# Altium PCB main.PcbDoc (part 1 of 2)
Units mm, origin at the board's own origin, x right, y up, seen from the top; angles counter-clockwise.
Board outline 83 x 38 mm, 4 copper layers (Top Layer, Inner 1, Inner 2, Bottom Layer), stack 1.586 mm thick; 91 components, 60 nets, 272 pads, 642 vias.
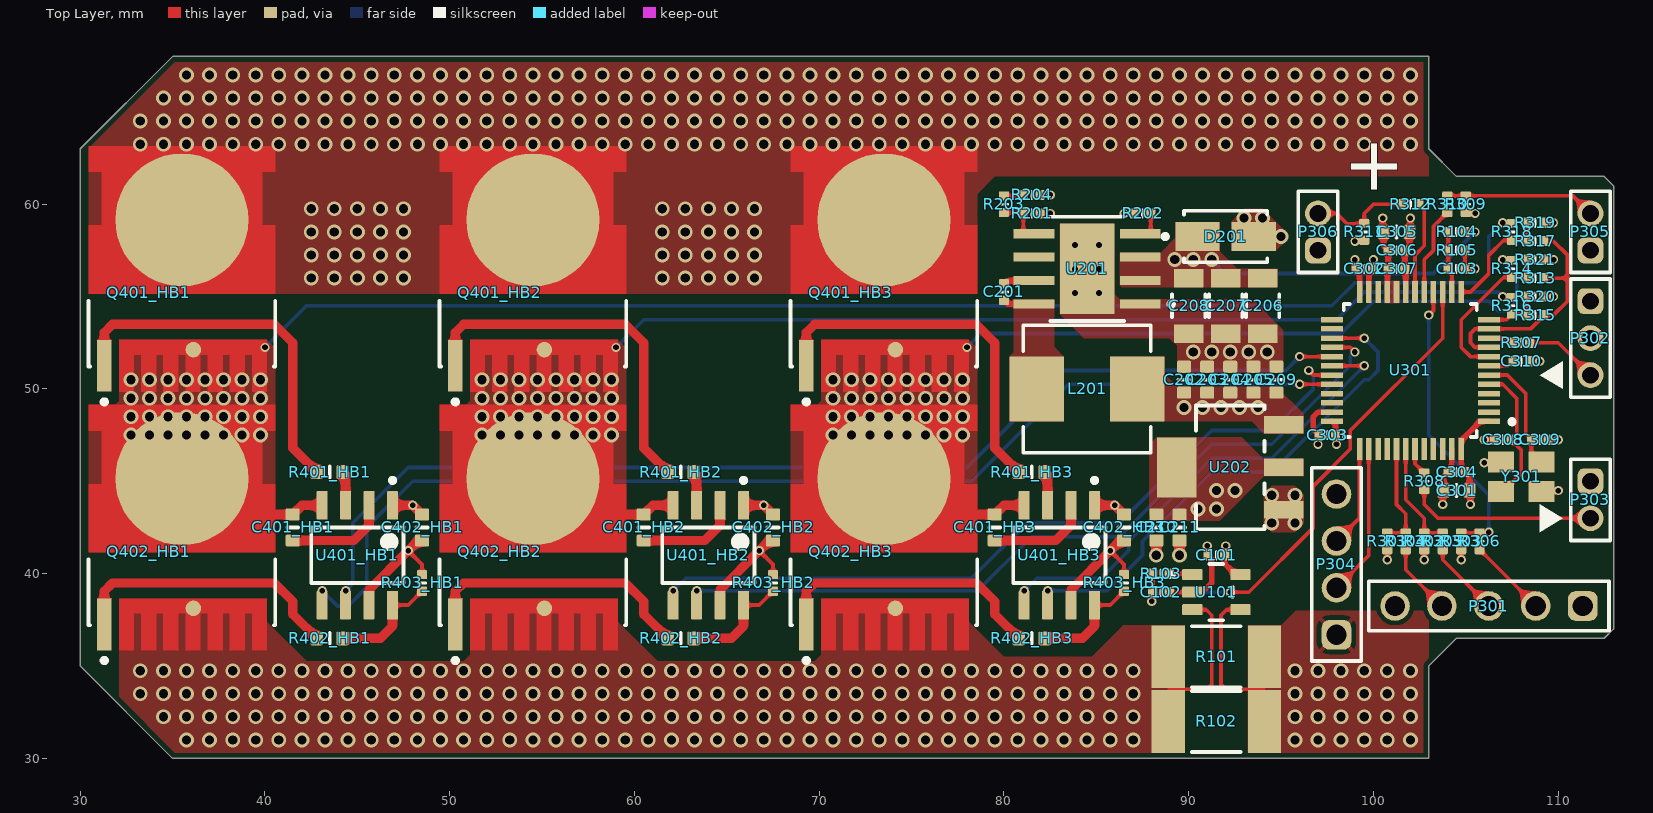
[diagram p0: Top Layer view]
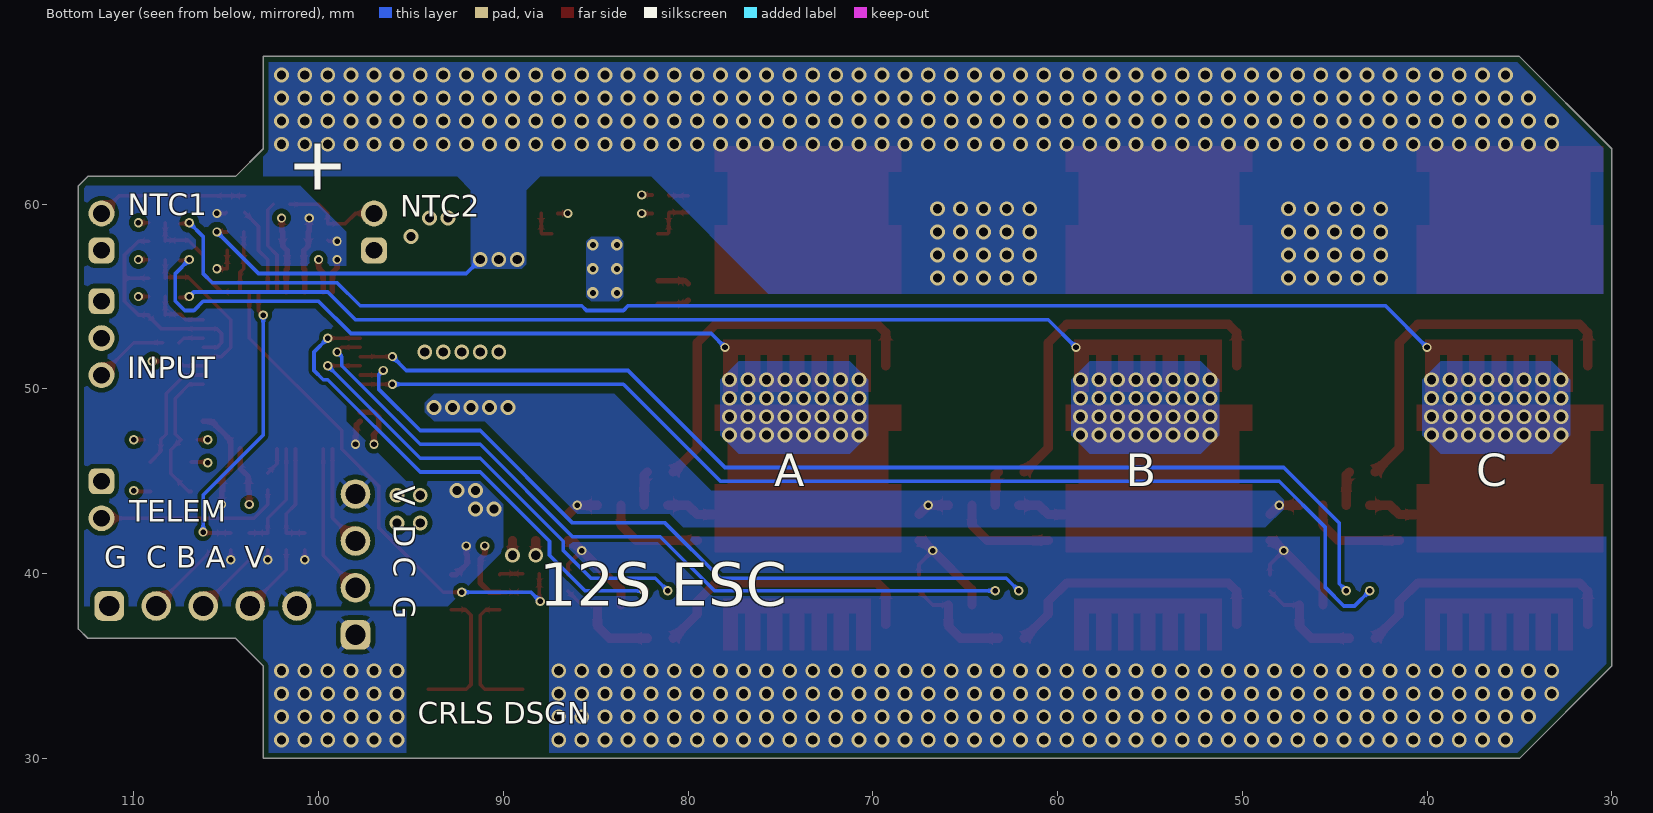
[diagram p1: Bottom Layer view, seen from below]
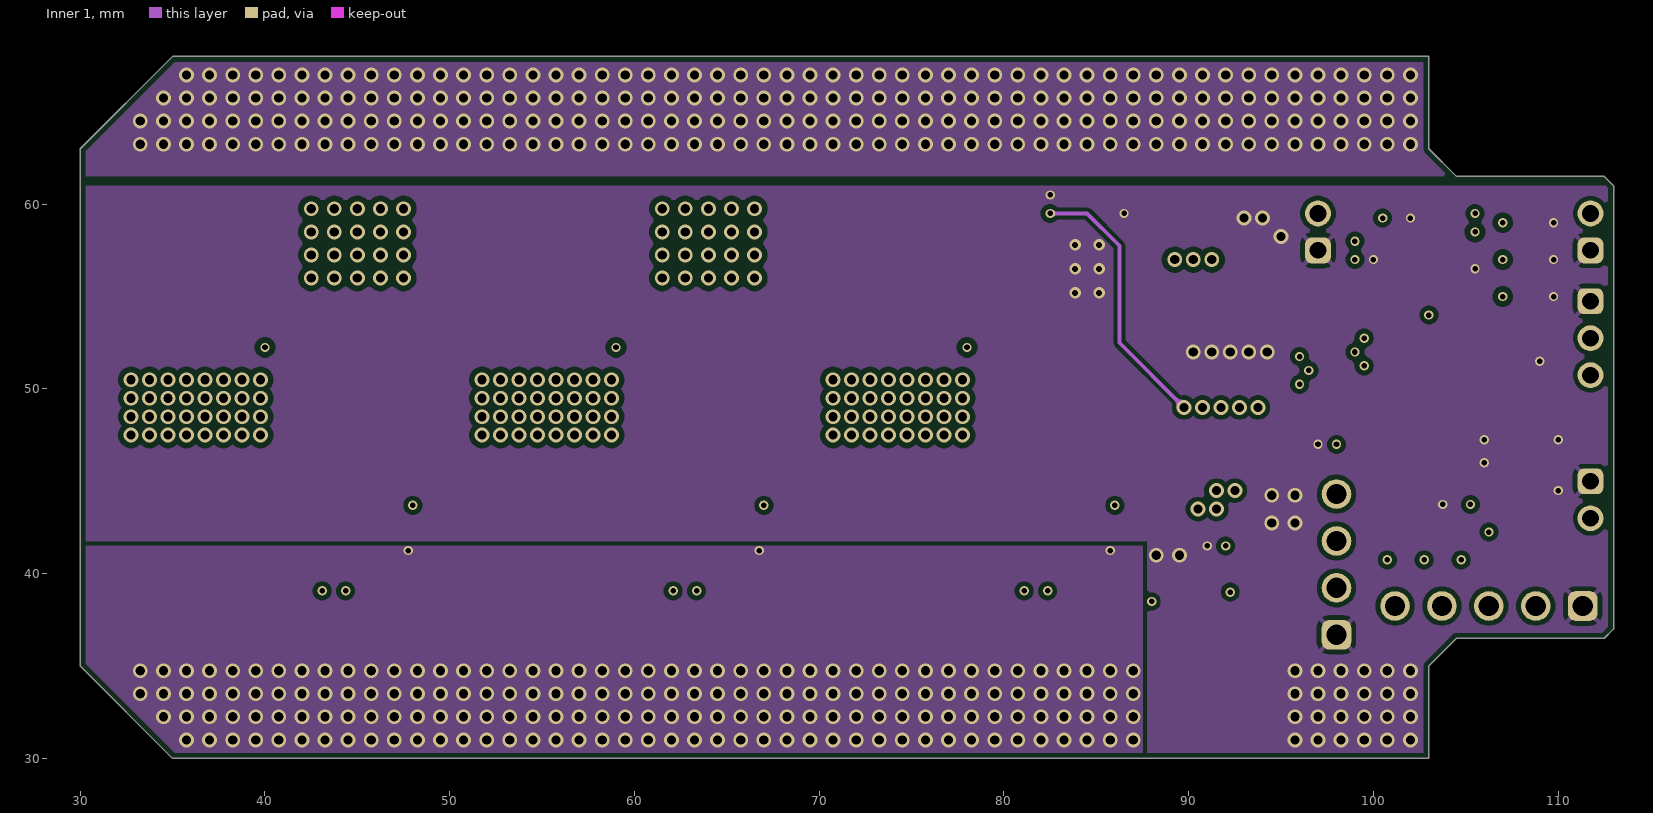
[diagram p2: Inner 1]
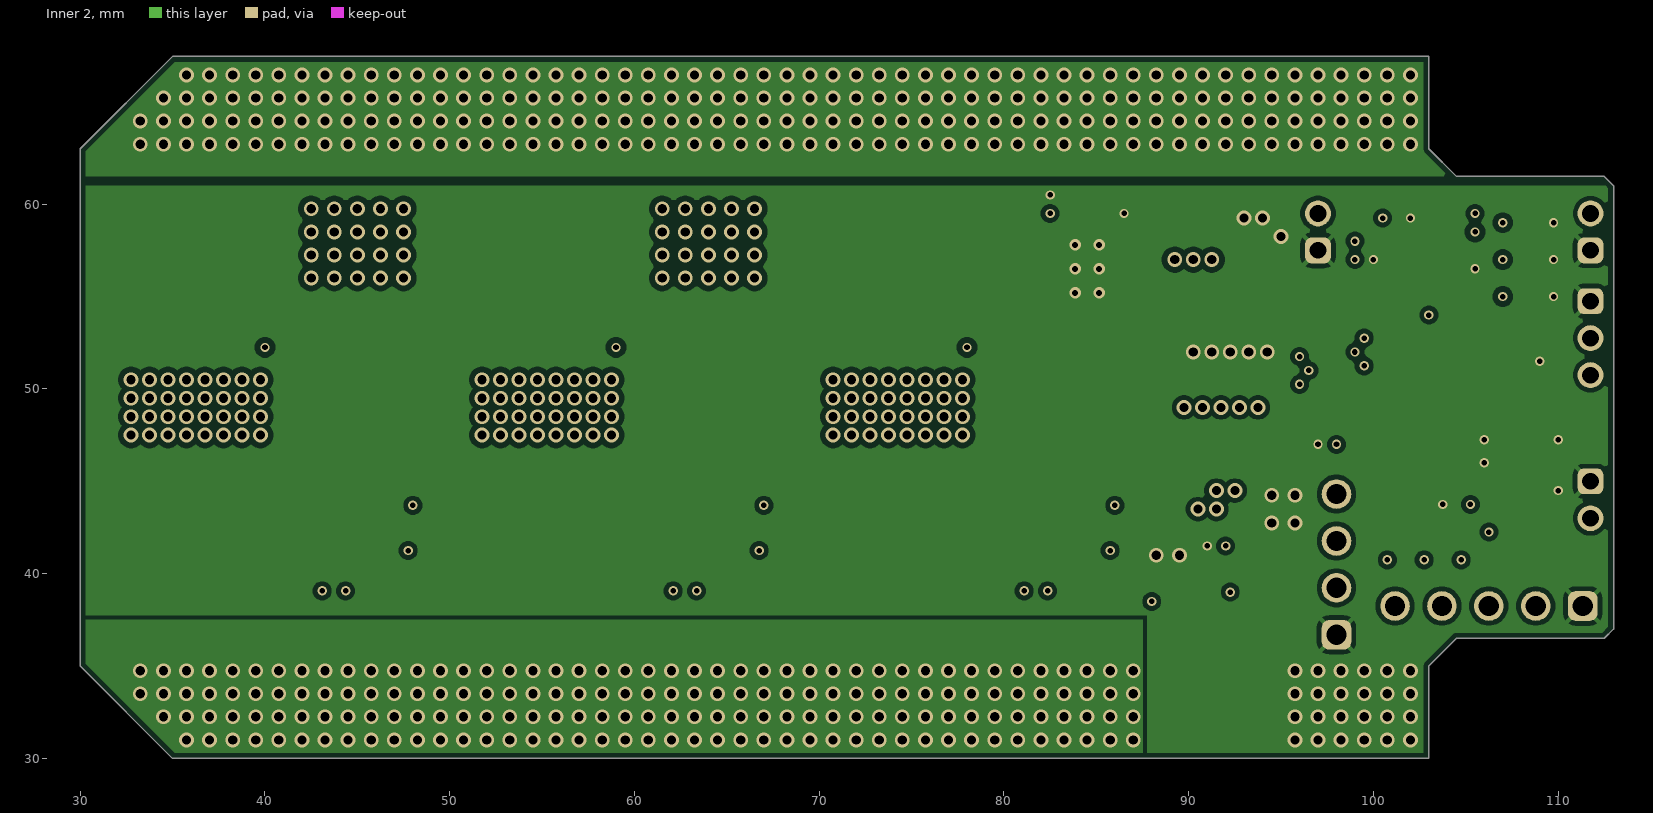
[diagram p3: Inner 2]
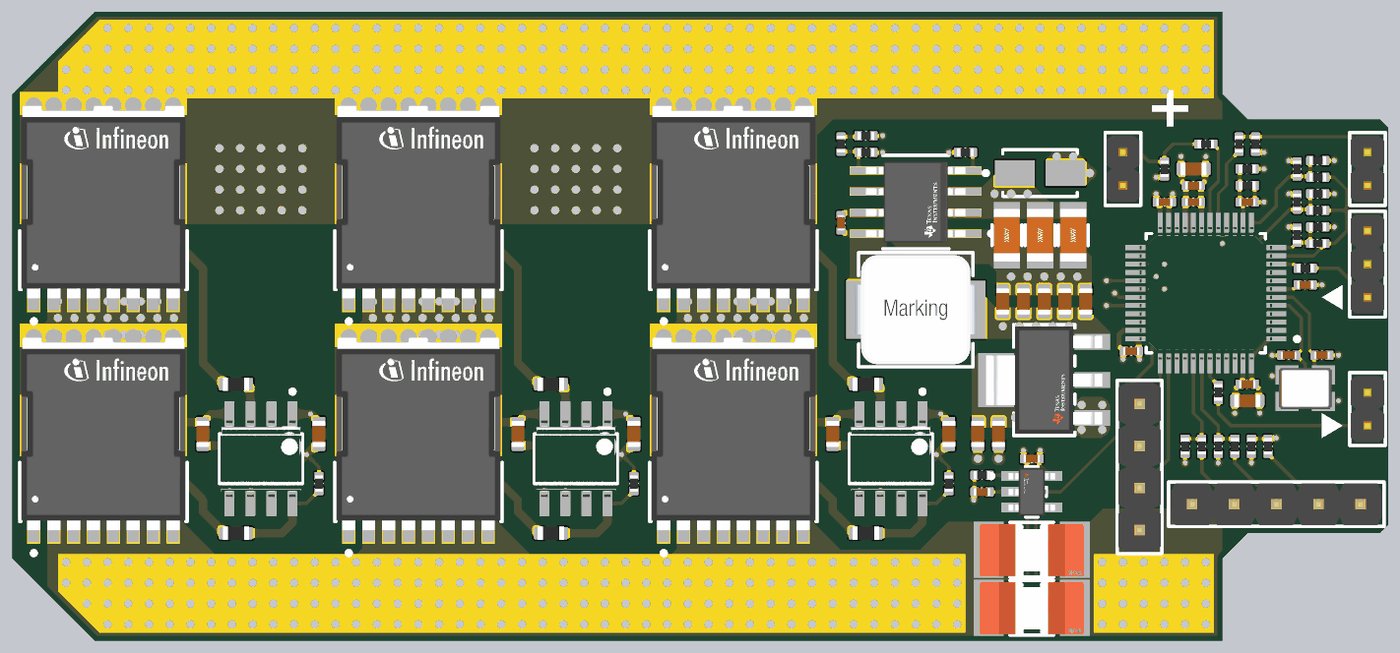
[diagram p5: 3D render of the assembled board from above, using the file's embedded part models]

## Layer stack, top to bottom
Top Solder: solder mask 0.0102, Solder Resist, Dk 3.5
Top Layer: signal copper 0.035
Dielectric 2: prepreg 0.2104, PP-006, Dk 4.4
Inner 1: signal copper 0.0152
Dielectric 1: dielectric 1.065, FR-4, Dk 4.6
Inner 2: signal copper 0.0152
Dielectric 3: prepreg 0.2104, PP-006, Dk 4.4
Bottom Layer: signal copper 0.035
Bottom Solder: solder mask 0.0102, Solder Resist, Dk 3.5

## Board outline
30,35 30,63 35,68 103,68 103,63 104.5,61.5 112.5,61.5 113,61 113,37 112.5,36.5 104.5,36.5 103,35 103,30 35,30

## Design rules (kind name [scope] priority, off if disabled: settings)
BoardOutlineClearance [All] p1: gap=0.3 ignorepadtopadclearanceinfootprint=FALSE
Clearance HVClearance [InNet('+BATT','PHASE_*')] p1: gap=0.3 ignorepadtopadclearanceinfootprint=TRUE except(0.25: Arc-Arc Arc-Track Arc-SMDPad Arc-THPad Arc-Via Arc-Text Arc-Hole Track-Track Track-SMDPad Track-THPad Track-Via Track-Text Track-Hole SMDPad-SMDPad SMDPad-THPad SMDPad-Via SMDPad-Text SMDPad-Hole THPad-THPad THPad-Via THPad-Text THPad-Hole Via-Via Via-Text Via-Hole Text-Text Text-Hole)
Clearance [All] p2: gap=0.25 ignorepadtopadclearanceinfootprint=TRUE except(0.2: Arc-Arc Arc-Track Arc-SMDPad Arc-Fill Arc-Poly Arc-Region Track-Track Track-SMDPad Track-Fill Track-Poly Track-Region SMDPad-SMDPad SMDPad-Fill SMDPad-Poly SMDPad-Region Fill-Fill Fill-Poly Fill-Region Poly-Poly Poly-Region Region-Region)
HoleSize [All] p1: absolutevalues=TRUE maxlimit=5 minlimit=0.025 maxpercent=80.000 minpercent=20.000
MinimumSolderMaskSliver [All] p1: minsoldermaskwidth=0
PolygonConnect HeadersPolygonConnect [InComponent('P*')] p1: connectstyle=Relief reliefconductorwidth=0.25 reliefentries=4 polygonreliefangle="45 Angle" airgapwidth=0.25
PolygonConnect [All] p2: connectstyle=Direct reliefconductorwidth=0.2 reliefentries=4 polygonreliefangle="90 Angle" airgapwidth=0.2
RoutingVias [All] p1: holewidth=0.3 width=0.5 viastyle="Through Hole" minholewidth=0.3 minwidth=0.5 maxholewidth=1 maxwidth=2
SilkToSilkClearance [All] p1: silktosilkclearance=0
SilkToSolderMaskClearance [IsPad] p1: minsilkscreentomaskgap=0 clearancetoexposedcopper=TRUE
SolderMaskExpansion [All] p1: expansion=0.102 istentingtop=FALSE
SupplyNets "Schematic Supply Nets_3" [InNet('+BATT')] p1: voltage=0.000
SupplyNets "Schematic Supply Nets_2" [InNet('+BUCK')] p2: voltage=0.000
SupplyNets "Schematic Supply Nets_1" [InNet('GND')] p3: voltage=0.000
SupplyNets "Schematic Supply Nets" [InNet('+MCU')] p4: voltage=0.000
Width [All] p1: maxlimit=1 minlimit=0.2 preferedwidth=0.2 minimp=50.000000 maximp=50.000000 favimp=50.000000
26 further rules are at their usual default settings.

## Classes and differential pairs
channel class "4 half bridge": HB1 HB2 HB3
component class PS: C201 C202 C203 C204 C205 C206 C207 C208 C209 C210 C211 D201 L201 R201 R202 R203 R204 U201 U202
component class MCU: C301 C302 C303 C304 C305 C306 C307 C308 C309 C310 P301 P302 P303 P304 P305 P306 R301 R302 R303 R304 R305 R306 R307 R308 R309 R310 R311 R312 R313 R314 R315 R316 R317 R318 R319 R320 R321 U301 Y301
component class HB3: C401_HB3 C402_HB3 Q401_HB3 Q402_HB3 R401_HB3 R402_HB3 R403_HB3 U401_HB3
component class HB2: C401_HB2 C402_HB2 Q401_HB2 Q402_HB2 R401_HB2 R402_HB2 R403_HB2 U401_HB2
component class HB1: C401_HB1 C402_HB1 Q401_HB1 Q402_HB1 R401_HB1 R402_HB1 R403_HB1 U401_HB1
component class "1 top": C101 C102 C103 R101 R102 R103 R104 R105 U101

## Components (designator, comment, footprint, x,y, rotation, side; value= is the part's Value field where it differs from the comment)
C101 "Capacitor 100nF +/-20% 25V 0402" CAPC0402(1005)60_L 91.5,41 r180 top value=100nF
C102 "Capacitor 100nF +/-20% 25V 0402" CAPC0402(1005)60_L 88.5,39 r0 top value=100nF
C103 "Capacitor 100nF +/-20% 25V 0402" CAPC0402(1005)60_L 104.5,56.5 r0 top value=100nF
C201 "Capacitor 2.2nF +/-20% 50V 0402" CAPC0402(1005)33_L 80,55.25 r270 top value=2.2nF
C202 "Capacitor 10µF +/-20% 10V 0603" CAPC0603(1608)100_L 89.75,50.5 r90 top value=10µF
C203 "Capacitor 10µF +/-20% 10V 0603" CAPC0603(1608)100_L 91,50.5 r90 top value=10µF
C204 "Capacitor 10µF +/-20% 10V 0603" CAPC0603(1608)100_L 92.25,50.5 r90 top value=10µF
C205 "Capacitor 10µF +/-20% 10V 0603" CAPC0603(1608)100_L 93.5,50.5 r90 top value=10µF
C206 "12061Z475KAT2A" FP-1206-L_3_2_0_2-W_1_6_0-MFG 94,54.5 r270 top
C207 "12061Z475KAT2A" FP-1206-L_3_2_0_2-W_1_6_0-MFG 92,54.5 r270 top
C208 "12061Z475KAT2A" FP-1206-L_3_2_0_2-W_1_6_0-MFG 90,54.5 r270 top
C209 "Capacitor 10µF +/-20% 10V 0603" CAPC0603(1608)100_L 94.75,50.5 r90 top value=10µF
C210 "Capacitor 10µF +/-20% 10V 0603" CAPC0603(1608)100_L 88.25,42.5 r270 top value=10µF
C211 "Capacitor 10µF +/-20% 10V 0603" CAPC0603(1608)100_L 89.5,42.5 r270 top value=10µF
C301 "Capacitor 10µF +/-20% 10V 0603" CAPC0603(1608)100_L 104.5,44.5 r180 top value=10µF
C302 "Capacitor 100nF +/-20% 25V 0402" CAPC0402(1005)60_L 99.5,56.5 r0 top value=100nF
C303 "Capacitor 100nF +/-20% 25V 0402" CAPC0402(1005)60_L 97.5,47.5 r180 top value=100nF
C304 "Capacitor 100nF +/-20% 25V 0402" CAPC0402(1005)60_L 104.5,45.5 r180 top value=100nF
C305 "Capacitor 10µF +/-20% 10V 0603" CAPC0603(1608)100_L 101.25,58.5 r0 top value=10µF
C306 "Capacitor 100nF +/-20% 25V 0402" CAPC0402(1005)60_L 101.25,57.5 r0 top value=100nF
C307 "Capacitor 100nF +/-20% 25V 0402" CAPC0402(1005)60_L 101.25,56.5 r0 top value=100nF
C308 "Capacitor 12pF +/-10% 50V 0402" CAPC0402(1005)33_L 107,47.25 r180 top value=12pF
C309 "Capacitor 12pF +/-10% 50V 0402" CAPC0402(1005)33_L 109,47.25 r0 top value=12pF
C310 "Capacitor 100nF +/-20% 25V 0402" CAPC0402(1005)60_L 108,51.5 r0 top value=100nF
C401_HB1 "Capacitor 10µF +/-20% 10V 0603" CAPC0603(1608)100_L 41.5,42.5 r90 top value=10µF (schematic designator C401)
C401_HB2 "Capacitor 10µF +/-20% 10V 0603" CAPC0603(1608)100_L 60.5,42.5 r90 top value=10µF (schematic designator C401)
C401_HB3 "Capacitor 10µF +/-20% 10V 0603" CAPC0603(1608)100_L 79.5,42.5 r90 top value=10µF (schematic designator C401)
C402_HB1 "Capacitor 10µF +/-20% 10V 0603" CAPC0603(1608)100_L 48.5,42.5 r270 top value=10µF (schematic designator C402)
C402_HB2 "Capacitor 10µF +/-20% 10V 0603" CAPC0603(1608)100_L 67.5,42.5 r270 top value=10µF (schematic designator C402)
C402_HB3 "Capacitor 10µF +/-20% 10V 0603" CAPC0603(1608)100_L 86.5,42.5 r270 top value=10µF (schematic designator C402)
D201 "SMAJ51A" VISH-DO-214AC-2_N 92,58.25 r0 top
L201 "74437349680" WE-LHMI_7050 84.5,50 r0 top
P301 "61300511121" 61300511121 106.25,38.25 r180 top
P302 "62000311121" 62000311121 111.75,52.75 r270 top
P303 "62000211121" 62000211121 111.75,44 r270 top
P304 "61300411121" 61300411121 98,40.5 r90 top
P305 "62000211121" 62000211121 111.75,58.5 r90 top
P306 "62000211121" 62000211121 97,58.5 r90 top
Q401_HB1 "HYG015N10NS1TA" FP-PG-HSOF-8-MFG 35.5,56.5 r0 top (schematic designator Q401)
Q401_HB2 "HYG015N10NS1TA" FP-PG-HSOF-8-MFG 54.5,56.5 r0 top (schematic designator Q401)
Q401_HB3 "HYG015N10NS1TA" FP-PG-HSOF-8-MFG 73.5,56.5 r0 top (schematic designator Q401)
Q402_HB1 "HYG015N10NS1TA" FP-PG-HSOF-8-MFG 35.5,42.5 r0 top (schematic designator Q402)
Q402_HB2 "HYG015N10NS1TA" FP-PG-HSOF-8-MFG 54.5,42.5 r0 top (schematic designator Q402)
Q402_HB3 "HYG015N10NS1TA" FP-PG-HSOF-8-MFG 73.5,42.5 r0 top (schematic designator Q402)
R101 "PSL2NTEBL500F" FP-PSL2NTEBL500F-MFG 91.5,35.5 r0 top
R102 "PSL2NTEBL500F" FP-PSL2NTEBL500F-MFG 91.5,32 r0 top
R103 "Resistor 10K  +/-1 % 0402 63 mW" RESC0402(1005)_L 88.5,40 r180 top value=10k
R104 "Resistor 100K +/-1 % 0402 63 mW" RESC0402(1005)_L 104.5,58.5 r0 top value=100k
R105 "Resistor 3K3 +/-1 % 0402 63 mW" RESC0402(1005)_L 104.5,57.5 r0 top value=3.3k
R201 "Resistor 100K +/-1 % 0402 63 mW" RESC0402(1005)_L 81.5,59.5 r180 top value=100k
R202 "Resistor 100K +/-1 % 0402 63 mW" RESC0402(1005)_L 87.5,59.5 r180 top value=100k
R203 "Resistor 10K  +/-1 % 0402 63 mW" RESC0402(1005)_L 80,60 r90 top value=10k
R204 "Resistor 1K2 +/-1 % 0402 63 mW" RESC0402(1005)_L 81.5,60.5 r0 top value=1.2k
R301 "Resistor 10K  +/-1 % 0402 63 mW" RESC0402(1005)_L 100.75,41.75 r90 top value=10k
R302 "Resistor 10K  +/-1 % 0402 63 mW" RESC0402(1005)_L 102.75,41.75 r90 top value=10k
R303 "Resistor 10K  +/-1 % 0402 63 mW" RESC0402(1005)_L 104.75,41.75 r90 top value=10k
R304 "Resistor 100R +/-1 % 0402 63 mW" RESC0402(1005)_L 101.75,41.75 r270 top value=100
R305 "Resistor 100R +/-1 % 0402 63 mW" RESC0402(1005)_L 103.75,41.75 r270 top value=100
R306 "Resistor 100R +/-1 % 0402 63 mW" RESC0402(1005)_L 105.75,41.75 r270 top value=100
R307 "Resistor 100R +/-1 % 0402 63 mW" RESC0402(1005)_L 108,52.5 r180 top value=100
R308 "Resistor 100R +/-1 % 0402 63 mW" RESC0402(1005)_L 102.75,45 r270 top value=100
R309 "Resistor 2K +/-5 % 0402 63 mW" RESC0402(1005)_L 105,60 r90 top value=2k
R310 "Resistor 2K +/-5 % 0402 63 mW" RESC0402(1005)_L 104,60 r90 top value=2k
R311 "Resistor 2K +/-5 % 0402 63 mW" RESC0402(1005)_L 99.5,58.5 r90 top value=2k
R312 "Resistor 2K +/-5 % 0402 63 mW" RESC0402(1005)_L 102,60 r180 top value=2k
R313 "Resistor 100K +/-1 % 0402 63 mW" RESC0402(1005)_L 108.75,56 r180 top value=100k
R314 "Resistor 100K +/-1 % 0402 63 mW" RESC0402(1005)_L 107.5,56.5 r90 top value=100k
R315 "Resistor 100K +/-1 % 0402 63 mW" RESC0402(1005)_L 108.75,54 r180 top value=100k
R316 "Resistor 100K +/-1 % 0402 63 mW" RESC0402(1005)_L 107.5,54.5 r90 top value=100k
R317 "Resistor 100K +/-1 % 0402 63 mW" RESC0402(1005)_L 108.75,58 r180 top value=100k
R318 "Resistor 100K +/-1 % 0402 63 mW" RESC0402(1005)_L 107.5,58.5 r90 top value=100k
R319 "Resistor 3K3 +/-1 % 0402 63 mW" RESC0402(1005)_L 108.75,59 r0 top value=3.3k
R320 "Resistor 3K3 +/-1 % 0402 63 mW" RESC0402(1005)_L 108.75,55 r0 top value=3.3k
R321 "Resistor 3K3 +/-1 % 0402 63 mW" RESC0402(1005)_L 108.75,57 r0 top value=3.3k
R401_HB1 "Resistor 20R +/-5 % 0603 0.1 W" RESC0603(1608)_L 43.5,45.5 r180 top value=20 (schematic designator R401)
R401_HB2 "Resistor 20R +/-5 % 0603 0.1 W" RESC0603(1608)_L 62.5,45.5 r180 top value=20 (schematic designator R401)
R401_HB3 "Resistor 20R +/-5 % 0603 0.1 W" RESC0603(1608)_L 81.5,45.5 r180 top value=20 (schematic designator R401)
R402_HB1 "Resistor 20R +/-5 % 0603 0.1 W" RESC0603(1608)_L 43.5,36.5 r180 top value=20 (schematic designator R402)
R402_HB2 "Resistor 20R +/-5 % 0603 0.1 W" RESC0603(1608)_L 62.5,36.5 r180 top value=20 (schematic designator R402)
R402_HB3 "Resistor 20R +/-5 % 0603 0.1 W" RESC0603(1608)_L 81.5,36.5 r180 top value=20 (schematic designator R402)
R403_HB1 "Resistor 10K  +/-1 % 0402 63 mW" RESC0402(1005)_L 48.5,39.5 r90 top value=10k (schematic designator R403)
R403_HB2 "Resistor 10K  +/-1 % 0402 63 mW" RESC0402(1005)_L 67.5,39.5 r90 top value=10k (schematic designator R403)
R403_HB3 "Resistor 10K  +/-1 % 0402 63 mW" RESC0402(1005)_L 86.5,39.5 r90 top value=10k (schematic designator R403)
U101 "INA180A4IDBVR" FP-DBV0005A-MFG 91.5,39 r0 top
U201 "LM5164DDAR" FP-DDA0008E-MFG 84.5,56.5 r180 top
U202 "TLV1117-33IDCYR" FP-DCY0004A-MFG 92.25,45.75 r180 top
U301 "STM32G431CBT6" FP-LQFP48-5B-MFG 102,51 r180 top
U401_HB1 "LM5101AMX/NOPB" FP-D0008A-MFG 45,41 r270 top (schematic designator U401)
U401_HB2 "LM5101AMX/NOPB" FP-D0008A-MFG 64,41 r270 top (schematic designator U401)
U401_HB3 "LM5101AMX/NOPB" FP-D0008A-MFG 83,41 r270 top (schematic designator U401)
Y301 "TSX-3225 24.0000MF20G-AC3" FP-TSX-3225-MFG 108,45.25 r0 top

## Footprints (in the part's own frame and the unit in brackets; to place one, negate y for a bottom-side part, rotate by r counter-clockwise, add the part's x,y. Pads: shape width x height; smd on the part's side, far side on the other; paste and mask are expansions set on the pad)
61300411121 [mm] "Pin Header, pitch 2.54 mm, THT, Vertical, single row, 4p"
  rrect50% 1.6x1.6 hole 1.1: 1(-3.81,0)
  round 1.6 hole 1.1: 2(-1.27,0) 3(1.27,0) 4(3.81,0)
  silkscreen extent -5.23,-1.35 5.23,1.35, body extent -5.08,-1.27 5.08,1.27, height 8.57
61300511121 [mm] "Pin Header, pitch 2.54 mm, THT, Vertical, single row, 5p"
  rrect50% 1.6x1.6 hole 1.1: 1(-5.08,0)
  round 1.6 hole 1.1: 2(-2.54,0) 3(0,0) 4(2.54,0) 5(5.08,0)
  silkscreen extent -6.5,-1.35 6.5,1.35, body extent -6.35,-1.27 6.35,1.27, height 8.57
62000211121 [mm] "Pin Header, pitch 2.00 mm, THT, Vertical, single row, 2p"
  rrect50% 1.4x1.4 hole 0.9: 1(-1,0)
  round 1.4 hole 0.9: 2(1,0)
  silkscreen extent -2.2,-1.07 2.2,1.07, body extent -2,-1 2,1, height 6.05
62000311121 [mm] "Pin Header, pitch 2.00 mm, THT, Vertical, single row, 3p"
  rrect50% 1.4x1.4 hole 0.9: 1(-2,0)
  round 1.4 hole 0.9: 2(0,0) 3(2,0)
  silkscreen extent -3.2,-1.07 3.2,1.07, body extent -3,-1 3,1, height 6.05
CAPC0402(1005)33_L [mm] "Chip Capacitor, Body 1.0x0.5mm, Height 0.33mm, IPC High Density"
  rrect25% 0.5x0.55 smd: 1(-0.45,0) 2(0.45,0)
  silkscreen extent 0,-0.2 0,0.2, body extent -0.5,-0.25 0.5,0.25, height 0.55
CAPC0402(1005)60_L [mm] "Chip Capacitor, Body 1.0x0.5mm, Height 0.6mm, IPC High Density"
  rrect25% 0.5x0.55 smd: 1(-0.45,0) 2(0.45,0)
  silkscreen extent 0,-0.2 0,0.2, body extent -0.5,-0.25 0.5,0.25, height 0.6
CAPC0603(1608)100_L [mm] "Chip Capacitor, Body 1.6x0.8mm, Height 1.0mm, IPC High Density"
  rrect25% 0.66x0.76 smd: 1(-0.7,0) 2(0.7,0)
  silkscreen extent 0,-0.3 0,0.3, body extent -0.8,-0.4 0.8,0.4, height 0.95
FP-1206-L_3_2_0_2-W_1_6_0-MFG [mm]
  rect 1x1.6 smd paste+0 mask+0: 1(-1.5,0) 2(1.5,0)
  silkscreen extent -0.63,-0.9 0.63,0.9, body extent -2.1,-1 2.1,1, height 0.25
FP-D0008A-MFG [mm]
  rrect17% 1.55x0.6 smd paste+0 mask+0: 1(-2.7,1.905) 2(-2.7,0.635) 3(-2.7,-0.635) 4(-2.7,-1.905) 5(2.7,-1.905) 6(2.7,-0.635) 7(2.7,0.635) 8(2.7,1.905)
  silkscreen extent -4.17,-2.5 1.5,2.5, body extent -3.57,-2.75 3.57,2.75, height 0.25
FP-DBV0005A-MFG [mm]
  rrect17% 1.1x0.6 smd paste+0 mask+0: 1(-1.3,0.95) 2(-1.3,0) 3(-1.3,-0.95) 4(1.3,-0.95) 5(1.3,0.95)
  silkscreen extent -2.57,-1.53 0.87,1.53, body extent -1.95,-1.78 1.95,1.78, height 0.25
FP-DCY0004A-MFG [mm]
  rect 2.15x0.95 smd paste+0 mask+0: 1(-2.9,2.3) 2(-2.9,0) 3(-2.9,-2.3)
  rect 2.15x3.25 smd paste+0 mask+0: 4(2.9,0)
  silkscreen extent -1.85,-3.35 1.85,3.35, body extent -4.08,-3.45 4.08,3.45, height 0.25
FP-DDA0008E-MFG [mm]
  rect 2.2x0.5 smd paste-1000 mask+0: 1(-2.875,1.905) 2(-2.875,0.635) 3(-2.875,-0.635) 4(-2.875,-1.905) 5(2.875,-1.905) 6(2.875,-0.635) 7(2.875,0.635) 8(2.875,1.905)
  rect 2.95x4.9 smd paste-1000 mask-1000: 9(0,0)
  silkscreen extent -4.68,-2.83 2,2.83, body extent -4.08,-2.68 4.08,2.68, height 0.25
FP-LQFP48-5B-MFG [mm]
  rect 1.2x0.3 smd paste+0 mask+0: 1(-4.25,2.75) 2(-4.25,2.25) 3(-4.25,1.75) 4(-4.25,1.25) 5(-4.25,0.75) 6(-4.25,0.25) 7(-4.25,-0.25) 8(-4.25,-0.75) 9(-4.25,-1.25) 10(-4.25,-1.75) 11(-4.25,-2.25) 12(-4.25,-2.75) 25(4.25,-2.75) 26(4.25,-2.25) 27(4.25,-1.75) 28(4.25,-1.25) 29(4.25,-0.75) 30(4.25,-0.25) 31(4.25,0.25) 32(4.25,0.75) 33(4.25,1.25) 34(4.25,1.75) 35(4.25,2.25) 36(4.25,2.75)
  rect 0.3x1.2 smd paste+0 mask+0: 13(-2.75,-4.25) 14(-2.25,-4.25) 15(-1.75,-4.25) 16(-1.25,-4.25) 17(-0.75,-4.25) 18(-0.25,-4.25) 19(0.25,-4.25) 20(0.75,-4.25) 21(1.25,-4.25) 22(1.75,-4.25) 23(2.25,-4.25) 24(2.75,-4.25) 37(2.75,4.25) 38(2.25,4.25) 39(1.75,4.25) 40(1.25,4.25) 41(0.75,4.25) 42(0.25,4.25) 43(-0.25,4.25) 44(-0.75,4.25) 45(-1.25,4.25) 46(-1.75,4.25) 47(-2.25,4.25) 48(-2.75,4.25)
  silkscreen extent -5.63,-3.6 3.6,3.6, body extent -4.95,-4.95 4.95,4.95, height 0.25
FP-PG-HSOF-8-MFG [mm]
  rect 0.8x2.8 smd paste-1000 mask+0: 1(-4.2,-5.25)
  round 0.837 smd paste-1000 mask+0: 2-3-4-5-6-7-8(0.625,-4.375)
  round 7.2 smd paste-1000 mask+0: 9(0,2.65)
  Top Layer region: -5.05,6.65 5.05,6.65 5.05,5.25 4.35,5.25 4.35,2.35 5.05,2.35 5.05,-1.35 -5.05,-1.35 -5.05,2.35 -4.35,2.35 -4.35,5.25 -5.05,5.25 -5.05,6.65
  Top Layer region: 4.6,-6.65 4.6,-3.85 -3.4,-3.85 -3.4,-6.65 -2.6,-6.65 -2.6,-4.65 -2.2,-4.65 -2.2,-6.65 -1.4,-6.65 -1.4,-4.65 -1,-4.65 -1,-6.65 -0.2,-6.65 -0.2,-4.65 0.2,-4.65 0.2,-6.65 1,-6.65 1,-4.65 1.4,-4.65 1.4,-6.65 2.2,-6.65 2.2,-4.65 2.6,-4.65 2.6,-6.65 3.4,-6.65 3.4,-4.65 3.8,-4.65 3.8,-6.65 4.6,-6.65
  silkscreen extent -5.05,-7.32 5.05,-1.73, body extent -5.15,-6.75 5.15,6.75, height 0.25
FP-PSL2NTEBL500F-MFG [mm]
  rect 1.8x3.4 smd paste+0 mask+0: 1(-2.6,0) 2(2.6,0)
  silkscreen extent -1.33,-1.65 1.33,1.65, body extent -3.6,-1.8 3.6,1.8, height 0.25
FP-TSX-3225-MFG [mm]
  rect 1.4x1.15 smd paste+0 mask+0: 1(-1.1,-0.8) 2(1.1,-0.8) 3(1.1,0.8) 4(-1.1,0.8)
  body extent -1.9,-1.48 1.9,1.48, height 0.25
RESC0402(1005)_L [mm] "Chip Resistor, Body 1.0x0.5mm, IPC High Density"
  rrect25% 0.5x0.55 smd: 1(-0.45,0) 2(0.45,0)
  silkscreen extent 0,-0.2 0,0.2, body extent -0.5,-0.25 0.5,0.25, height 0.3
RESC0603(1608)_L [mm] "Chip Resistor, Body 1.6x0.8mm, IPC High Density"
  rrect25% 0.66x0.76 smd: 1(-0.7,0) 2(0.7,0)
  silkscreen extent 0,-0.3 0,0.3, body extent -0.8,-0.4 0.8,0.4, height 0.45
VISH-DO-214AC-2_N [mm] "DO-214AC, 2-Leads, Body 4.5x2.79mm, IPC Medium Density"
  rect 2.4x1.55 smd: 1(-1.525,0) 2(1.525,0)
  silkscreen extent -3.4,-1.4 2.25,1.4, body extent -2.25,-1.4 2.25,1.39, height 2.29
WE-LHMI_7050 [mm] "SMT Power Inductor, 2-Leads, body 6.6x6.6mm"
  rect 2.95x3.5 smd: 1(-2.725,0) 2(2.725,0)
  silkscreen extent -3.45,-3.45 3.45,3.45, body extent -3.65,-3.3 3.65,3.3, height 4.8

## Part data
C101 C102 C103 C302 C303 C304 C306 C307 C310: library part CMP-001-00065-4, "Chip Capacitor, 100nF +/-20%, 25V, 0402, Thickness 0.6 mm", Case/Package=0402, Max Operating Temperature=85°C, Min Operating Temperature=-55°C, Tolerance=10%, Voltage Rating=25V, Mounting Technology=SMT, Pins=2
C201: library part CMP-001-00066-3, "Chip Capacitor, 1nF +/-20%, 50V, 0402, Thickness 0.33 mm", Case/Package=0402, Max Operating Temperature=85°C, Min Operating Temperature=-55°C, Tolerance=10%, Voltage Rating=50V, Mounting Technology=SMT, Pins=2
C202 C203 C204 C205 C209 C210 C211 C301 C305 C401_HB1 C401_HB2 C401_HB3 C402_HB1 C402_HB2 C402_HB3: library part CMP-001-00075-4, "Chip Capacitor, 10µF +/-20%, 10V, 0603, Thickness 1 mm", Case/Package=0603, Max Operating Temperature=85°C, Min Operating Temperature=-55°C, Tolerance=10%, Voltage Rating=10V, Mounting Technology=SMT, Pins=2
C206 C207 C208: library part CMP-2000-05019-2, "CAP CER 4.7UF 100V X7S 1206", Capacitance=4.7uF, Case Code (Imperial)=1206, Case Code (Metric)=3216, Dielectric=X7S, Max Operating Temperature=125°C, Min Operating Temperature=-55°C, Package Quantity=1, Tolerance=10%, Voltage Rating=100V, Case/Package=1206, Depth=1.6mm, Height=0.5mm, Lead Free="Lead Free", Length=3.2mm, Mount="Surface Mount", Packaging="Tape and Reel", REACH SVHC="No SVHC", RoHS Compliant=Yes, Termination=SMD/SMT, Thickness=0.075inch, Voltage Rating (DC)=100V, Weight=0.000571oz, Width=0.063inch
C308 C309: library part CMP-001-00072-4, "Chip Capacitor, 12pF +/-10%, 50V, 0402, Thickness 0.33 mm", Case/Package=0402, Max Operating Temperature=85°C, Min Operating Temperature=-55°C, Tolerance=20%, Voltage Rating=50V, Mounting Technology=SMT, Pins=2
D201: library part CMP-0544-00031-2, "Transient Voltage Suppressor, 6.40 to 231 V, 51 V Stand-off Voltage, Uni-Directional, -55 to 155 degC, 2-pin DO-214AC, Pb-Free, Tape and Reel", Manufacturer="Vishay Semiconductor", Operating Junction and Storage Temperature Range="-55 to 150 degC", PartNumber=SMAJ51A-E3/5A, ComponentLink1Description="Manufacturer URL", ComponentLink1URL=http://www.vishay.com/, ComponentLink2Description=Datasheet, ComponentLink2URL=http://www.vishay.com/docs/88390/smaj50a.pdf, ComponentLink3Description="Package Specification", ComponentLink3URL=http://www.vishay.com/docs/88390/smaj50a.pdf, DatasheetVersion=12/8/2013, ID (uA)=1, IFSM="40 A", Mounting Technology="Surface Mount", PackageDescription="2-Pin DO-214AC (SMA), Body 4.245 x 2.665 mm", PackageReference=DO-214AC-2, Packing="Tape and Reel", PPPM (W)="400, 300", RoHS=TRUE, VBR Uni-Directional (V)="6.4 to 231", VWM (V)=51
L201: library part CMP-1353-00069-6, Ambient Temperature Range High=85°C, Ambient Temperature Range Low=-40°C, DC Resistance (DCR)=386mΩ, Inductance=68µH, Inductance Tolerance=20%, Max Operating Temperature=125°C, Saturation Current=1.45A, Height=4.8mm, Length=7.3mm, Min Operating Temperature=-40°C, NexarPartId=65255814, RoHS=Compliant, Width=6.6mm
P301: library part CMP-1502-01068-3, Color=Black, Contact Resistance=20mΩ, Current Rating=3A, Max Operating Temperature=105°C, Min Operating Temperature=-40°C, Operating Supply Voltage=250V, Connector Type="Male Pin", Contact Material=Copper, Contact Mating Length=5.9944mm, Contact Plating=Gold, Gender=Male, Height=8.89mm, Lead Free="Lead Free", Lead Pitch=2.54mm, Mount="Through Hole", NexarPartId=32855526, Number of Contacts=5, Number of Pins=5, Number of Positions=5, Number of Rows=1, Orientation=Vertical, Packaging=Bulk, Pitch=2.54mm, REACH SVHC=Unknown, RoHS=Compliant, Termination=Solder, Voltage Rating=250V
P302: library part CMP-1502-00957-4, Contact Resistance=20mΩ, Current Rating=2A, Max Operating Temperature=105°C, Min Operating Temperature=-40°C, Operating Supply Voltage=200V, Contact Material=Gold, Gender=Male, Height=6.35mm, Lead Pitch=2mm, NexarPartId=61924779, Number of Contacts=3, Number of Pins=3, Number of Rows=1, Orientation=Vertical, RoHS=Non-Compliant, Voltage Rating=200V
P303 P305 P306: library part CMP-1502-00956-4, Contact Resistance=20mΩ, Current Rating=2A, Max Operating Temperature=105°C, Min Operating Temperature=-40°C, Operating Supply Voltage=200V, Contact Material=Gold, Gender=Male, Height=6.35mm, Lead Pitch=2mm, NexarPartId=61924778, Number of Contacts=2, Number of Pins=2, Number of Rows=1, Orientation=Vertical, RoHS=Non-Compliant, Voltage Rating=200V
P304: library part CMP-1502-01064-3, Color=Black, Contact Resistance=20mΩ, Current Rating=3A, Max Operating Temperature=105°C, Min Operating Temperature=-40°C, Operating Supply Voltage=250V, Connector Type="Male Pin", Contact Material=Copper, Contact Mating Length=5.9944mm, Contact Plating=Gold, Gender=Male, Height=8.89mm, Lead Free="Lead Free", Lead Pitch=2.54mm, Mount="Through Hole", NexarPartId=32855522, Number of Contacts=4, Number of Pins=4, Number of Positions=4, Number of Rows=1, Orientation=Vertical, Packaging=Bulk, Pitch=2.54mm, REACH SVHC=Unknown, RoHS=Compliant, Termination=Solder, Voltage Rating=250V
Q401_HB1 Q401_HB2 Q401_HB3 Q402_HB1 Q402_HB2 Q402_HB3: library part CMP-00196-91542042-1, "HYG015N10NS1TA 100V, N-Ch, 1.2 mΩ max, Automotive MOSFET, TOLL, OptiMOS™-5, PG-HSOF-8, RoHS", Continuous Drain Current (ID)=200A, Drain to Source Breakdown Voltage=80V, Drain to Source Resistance=1.8mΩ, Gate to Source Voltage (Vgs)=20V, Manufacturer Package Identifier=PG-HSOF-8, Max Junction Temperature (Tj)=175°C, Min Operating Temperature=-55°C, Package Quantity=2000, Power Dissipation=200W, Drain to Source Voltage (Vdss)=80V, Lifecycle Status=Production, Max Operating Temperature=175°C, NexarPartId=91542042, Number of Channels=1, Packaging="Tape & Reel", RoHS=Non-Compliant, Schedule B="8541290080, 8541290080", Turn-Off Delay Time=30ns, Turn-On Delay Time=16ns
R101 R102: library part CMP-04015-070281-1, "RES 500 UOHM 1% 8W NONSTANDARD", RoHS Compliant=Yes
R103 R203 R301 R302 R303 R403_HB1 R403_HB2 R403_HB3: library part CMP-009-00149-3, "Chip Resistor, 10 kOhms, +/-1 %, 63 mW, -55 to 125 degC, 0402", Case/Package=0402, Max Operating Temperature=155°C, Min Operating Temperature=-55°C, Power=63mW, Tolerance=1%, Pins=2
R104 R201 R202 R313 R314 R315 R316 R317 R318: library part CMP-009-00168-3, "Chip Resistor, 100 kOhms, +/-1 %, 63 mW, -55 to 155 degC, 0402", Case/Package=0402, Max Operating Temperature=155°C, Min Operating Temperature=-55°C, Power=63mW, Tolerance=1%, Pins=2
R105 R319 R320 R321: library part CMP-009-00145-3, "Chip Resistor, 3.3 kOhms, +/-1 %, 63 mW, -55 to 155 degC, 0402", Case/Package=0402, Max Operating Temperature=155°C, Min Operating Temperature=-55°C, Power=63mW, Tolerance=1%, Pins=2
R204: library part CMP-009-00157-3, "Chip Resistor, 1.2 kOhms, +/-1 %, 63 mW, -55 to 155 degC, 0402", Case/Package=0402, Max Operating Temperature=155°C, Min Operating Temperature=-55°C, Power=63mW, Tolerance=1%, Pins=2
R304 R305 R306 R307 R308: library part CMP-009-00167-3, "Chip Resistor, 100 Ohms, +/-1 %, 63 mW, -55 to 155 degC, 0402", Case/Package=0402, Max Operating Temperature=155°C, Min Operating Temperature=-55°C, Power=63mW, Tolerance=1%, Pins=2
R309 R310 R311 R312: library part CMP-009-00138-3, "Chip Resistor, 2 kOhms, +/-5 %, 63 mW, -55 to 155 degC, 0402", Case/Package=0402, Max Operating Temperature=155°C, Min Operating Temperature=-55°C, Power=63mW, Tolerance=5%, Pins=2
R401_HB1 R401_HB2 R401_HB3 R402_HB1 R402_HB2 R402_HB3: library part CMP-009-00183-1, "Chip Resistor, 20 Ohms, +/-5 %, 0.1 W, -55 to 155 degC, 0603", Case/Package=0603, Max Operating Temperature=155°C, Min Operating Temperature=-55°C, Power=100mW, Tolerance=5%, Pins=2
U101: library part CMP-04895-000244-1, "IC CURR SENSE 1 CIRCUIT SOT23-5", Case/Package=SOT-23-5, Input Bias Current=100nA, Input Offset Voltage (Vos)=100uV, Max Operating Temperature=125°C, Min Operating Temperature=-40°C, Operating Supply Current=260uA, -3db Bandwidth=350kHz, Mount="Surface Mount", Number of Circuits=1, Packaging="Tape and Reel", RoHS Compliant=Yes, Slew Rate=2V/µs
U201: library part CMP-04918-000011-1, "POWER MANAGEMENT", Manufacturer="Texas Instruments", Max Junction Temp=+150°C, Max Supply Voltage=100V, Min Supply Voltage=6V, Nominal Supply Current=600uA, Output Current=1A, Output Voltage=1.2-90V, Package=DDA0008E, Switching Frequency=1000kHz, Temperature="-40°C to +150°C", Temperature Range Low=-40°C, Automotive=No, Category=IC, ComponentLink2Description=Datasheet, ComponentLink2URL=http://www.ti.com/lit/ds/symlink/lm5164.pdf, Device Class L1="Integrated Circuits (ICs)", Device Class L2="Power Management ICs", Device Class L3="Voltage Regulators - Switching", Digikey Description="POWER MANAGEMENT", Lead Free=Yes, Manufacturer Part Number=LM5164DDAR, Max Duty Cycle=99%, Mouser Description="6-V to 100-V input, 1-A synchronous buck DC-DC converter with ultra-low IQ 8-SO PowerPAD -40 to 150", Number Of Outputs=1, Octopart=https://octopart.com/lm5164ddar-texas+instruments-96785744, Output Type=AdjustableProgrammable, RoHS=TRUE, Standoff Height=0mm, Switching Topology=Buck, Temperature Range High=+150°C
U202: library part CMP-04917-000056-1, "IC REG LIN 3.3V 800MA SOT223-4", Dropout Voltage=1.2V, Manufacturer="Texas Instruments", Max Junction Temp=+125°C, Max Supply Voltage=15V, Min Supply Voltage=4.7V, Nominal Supply Current=5mA, Output Current=0.8A, Output Voltage=3.3V, Package=DCY0004A, Temperature="-40°C to +125°C", Temperature Range Low=-40°C, Automotive=No, Category=IC, ComponentLink2Description=Datasheet, ComponentLink2URL=http://www.ti.com/lit/ds/symlink/tlv1117.pdf, Device Class L1="Integrated Circuits (ICs)", Device Class L2="Power Management ICs", Device Class L3="Voltage Regulators - Linear", Digikey Description="IC REG LIN 3.3V 800MA SOT223-4", Height=1.8mm, Lead Free=Yes, Manufacturer Part Number=TLV1117-33IDCYR, Mouser Description="LDO Voltage Regulators Fixed LDO Volt Reg", Number Of Outputs=1, Octopart=https://octopart.com/tlv1117-33idcyr-texas+instruments-669250, Output Type=Fixed, RoHS=TRUE, Standoff Height=0.02mm, Temperature Range High=+125°C
U301: library part CMP-12105-000030-1, "MAINSTREAM ARM CORTEX-M4+ MCU 17", Ambient Temperature Range High=+85°C, Ambient Temperature Range Low=-40°C, Frequency=170MHz, Manufacturer=STMicroelectronics, Max Junction Temp=+105°C, Max Supply Voltage=3.6V, Min Supply Voltage=1.62V, Package=LQFP48-5B, Temperature="-40°C to +85°C", Automotive=No, Category=IC, ComponentLink2Description=Datasheet, ComponentLink2URL=https://www.st.com/resource/en/datasheet/stm32g431cb.pdf, Core Architecture="Arm Cortex-M4", Data Bus Width=32bits, Device Class L1="Integrated Circuits (ICs)", Device Class L2="Embedded Processors and Controllers", Device Class L3=Microcontrollers, Digikey Description="MAINSTREAM ARM CORTEX-M4+ MCU 17", Height=1.6mm, Interface=I2C,SPI,UART,USART,CAN,USB,LIN,IrDA,I2S, Lead Free=Yes, Manufacturer Part Number=STM32G431CBT6, Memory Size=128KBytes, Memory Type=FLASH, Number Of A/D Converters=1, Number Of Adc Channels=17, Number Of Cores=1, Number Of I2C Channels=3, Number Of I/Os=38, Number Of Pwm Channels=31, Number Of Spi Channels=3, Number Of Timers/Counters=14, Number Of Uart Channels=4, Number Of Usb Channels=1, Octopart=https://octopart.com/stm32g431cbt6-stmicroelectronics-98835224, Ram Size=32KBytes, RoHS=TRUE, Standoff Height=0.05mm, Temperature Range High=+85°C, Temperature Range Low=-40°C
U401_HB1 U401_HB2 U401_HB3: library part CMP-04912-000094-1, "IC GATE DRVR HALF-BRIDGE 8SOIC", Case/Package=SOIC, Max Operating Temperature=125°C, Max Output Current=3A, Max Supply Voltage=14V, Min Operating Temperature=-40°C, Min Supply Voltage=9V, Nominal Supply Current=2mA, Package Quantity=2500, Quiescent Current=200uA, Fall Time=260ns, Lead Free="Lead Free", Mount="Surface Mount", Number of Channels=2, Number of Drivers=2, Number Of Outputs=2, Number of Pins=8, Output Current=3A, Packaging="Tape and Reel", Propagation Delay=26ns, Radiation Hardening=No, Rise Time=430ns, RoHS Compliant=Yes, Series=LM5101A, Supply Current=2mA, Turn-Off Delay Time=4ns, Turn-On Delay Time=4ns
Y301: library part CMP-36405-000018-1, "CRYSTAL 24.0000MHZ 9PF SMD", Case/Package=SMD/SMT, ESR (Equivalent Series Resistance)=40R, Frequency=24MHz, Frequency Stability=20ppm, Frequency Tolerance=10ppm, Load Capacitance=9pF, Max Operating Temperature=105°C, Min Operating Temperature=-40°C, Package Quantity=250, Depth=2.5mm, Drive Level=200uW, Height=0.024inch, Lead Free="Lead Free", Length=3.2mm, Mount="Surface Mount", Number of Pins=4, Packaging="Tape and Reel", RoHS Compliant=Yes, Series=TSX-3225, Termination=SMD/SMT, Tolerance=10ppm, Weight=0.000564oz, Width=2.5mm

## Via types
v1: diameter 0.8, hole 0.5, Top Layer to Bottom Layer, tented both sides, 580 vias
v2: diameter 0.5, hole 0.3, Top Layer to Bottom Layer, tented both sides, 56 vias
v3: diameter 0.63, hole 0.33, Top Layer to Bottom Layer, 6 vias

## Nets (pads, with @x,y where several pads share a name; then routed paths per layer and width w, separated by ;. In a path a pad name is that pad's centre, name@x,y a point inside that pad or via, vN(x,y) a via of type N, cw(c..) or ccw(c..) an arc to the next point about the centre after c; other vN are vias at no path point)
+BATT: C206.1 C207.1 C208.1 D201.1 Q401_HB1.9 Q401_HB2.9 Q401_HB3.9 R104.2 U201.2 U201.3 | length 16
  Top Layer w0.2: R104.2@104.95,58.5 v2(105.5,58.5)
  Bottom Layer w0.2: v1(91.25,57) 92,56.25 103.25,56.25 v2(105.5,58.5)
  other v1: 42.5,56 43.75,56 45,56 46.25,56 47.5,56 61.5,56 62.75,56 64,56 65.25,56 66.5,56 89.25,57 90.25,57 42.5,57.25 43.75,57.25 45,57.25 46.25,57.25 47.5,57.25 61.5,57.25 62.75,57.25 64,57.25 65.25,57.25 66.5,57.25 42.5,58.5 43.75,58.5 45,58.5 46.25,58.5 47.5,58.5 61.5,58.5 62.75,58.5 64,58.5 65.25,58.5 66.5,58.5 42.5,59.75 43.75,59.75 45,59.75 46.25,59.75 47.5,59.75 61.5,59.75 62.75,59.75 64,59.75 65.25,59.75 66.5,59.75 33.25,63.25 34.5,63.25 35.75,63.25 37,63.25 38.25,63.25 39.5,63.25 40.75,63.25 42,63.25 43.25,63.25 44.5,63.25 45.75,63.25 47,63.25 48.25,63.25 49.5,63.25 50.75,63.25 52,63.25 53.25,63.25 54.5,63.25 55.75,63.25 57,63.25 58.25,63.25 59.5,63.25 60.75,63.25 62,63.25 63.25,63.25 64.5,63.25 65.75,63.25 67,63.25 68.25,63.25 69.5,63.25 70.75,63.25 72,63.25 73.25,63.25 74.5,63.25 75.75,63.25 77,63.25 78.25,63.25 79.5,63.25 80.75,63.25 82,63.25 83.25,63.25 84.5,63.25 85.75,63.25 87,63.25 88.25,63.25 89.5,63.25 90.75,63.25 92,63.25 93.25,63.25 94.5,63.25 95.75,63.25 97,63.25 98.25,63.25 99.5,63.25 100.75,63.25 102,63.25 33.25,64.5 34.5,64.5 35.75,64.5 37,64.5 38.25,64.5 39.5,64.5 40.75,64.5 42,64.5 43.25,64.5 44.5,64.5 45.75,64.5 47,64.5 48.25,64.5 49.5,64.5 50.75,64.5 52,64.5 53.25,64.5 54.5,64.5 55.75,64.5 57,64.5 58.25,64.5 59.5,64.5 60.75,64.5 62,64.5 63.25,64.5 64.5,64.5 65.75,64.5 67,64.5 68.25,64.5 69.5,64.5 70.75,64.5 72,64.5 73.25,64.5 74.5,64.5 75.75,64.5 77,64.5 78.25,64.5 79.5,64.5 80.75,64.5 82,64.5 83.25,64.5 84.5,64.5 85.75,64.5 87,64.5 88.25,64.5 89.5,64.5 90.75,64.5 92,64.5 93.25,64.5 94.5,64.5 95.75,64.5 97,64.5 98.25,64.5 99.5,64.5 100.75,64.5 102,64.5 34.5,65.75 35.75,65.75 37,65.75 38.25,65.75 39.5,65.75 40.75,65.75 42,65.75 43.25,65.75 44.5,65.75 45.75,65.75 47,65.75 48.25,65.75 49.5,65.75 50.75,65.75 52,65.75 53.25,65.75 54.5,65.75 55.75,65.75 57,65.75 58.25,65.75 59.5,65.75 60.75,65.75 62,65.75 63.25,65.75 64.5,65.75 65.75,65.75 67,65.75 68.25,65.75 69.5,65.75 70.75,65.75 72,65.75 73.25,65.75 74.5,65.75 75.75,65.75 77,65.75 78.25,65.75 79.5,65.75 80.75,65.75 82,65.75 83.25,65.75 84.5,65.75 85.75,65.75 87,65.75 88.25,65.75 89.5,65.75 90.75,65.75 92,65.75 93.25,65.75 94.5,65.75 95.75,65.75 97,65.75 98.25,65.75 99.5,65.75 100.75,65.75 102,65.75 35.75,67 37,67 38.25,67 39.5,67 40.75,67 42,67 43.25,67 44.5,67 45.75,67 47,67 48.25,67 49.5,67 50.75,67 52,67 53.25,67 54.5,67 55.75,67 57,67 58.25,67 59.5,67 60.75,67 62,67 63.25,67 64.5,67 65.75,67 67,67 68.25,67 69.5,67 70.75,67 72,67 73.25,67 74.5,67 75.75,67 77,67 78.25,67 79.5,67 80.75,67 82,67 83.25,67 84.5,67 85.75,67 87,67 88.25,67 89.5,67 90.75,67 92,67 93.25,67 94.5,67 95.75,67 97,67 98.25,67 99.5,67 100.75,67 102,67